# EAGLE board MCU_Module (EAGLE 9.0.0)
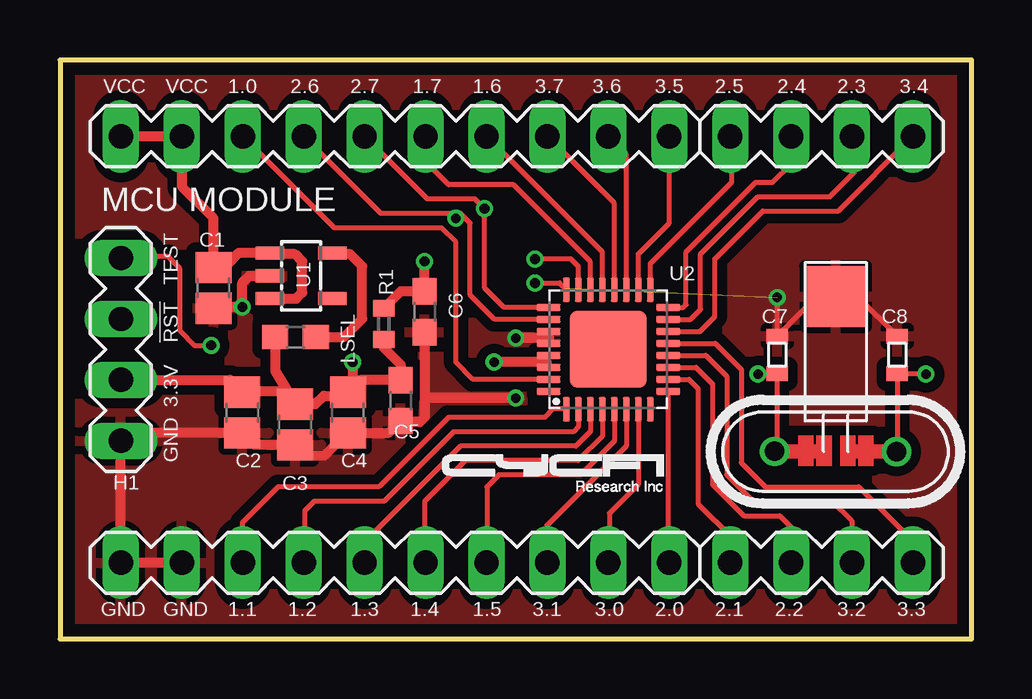
[diagram p0: board, top side]
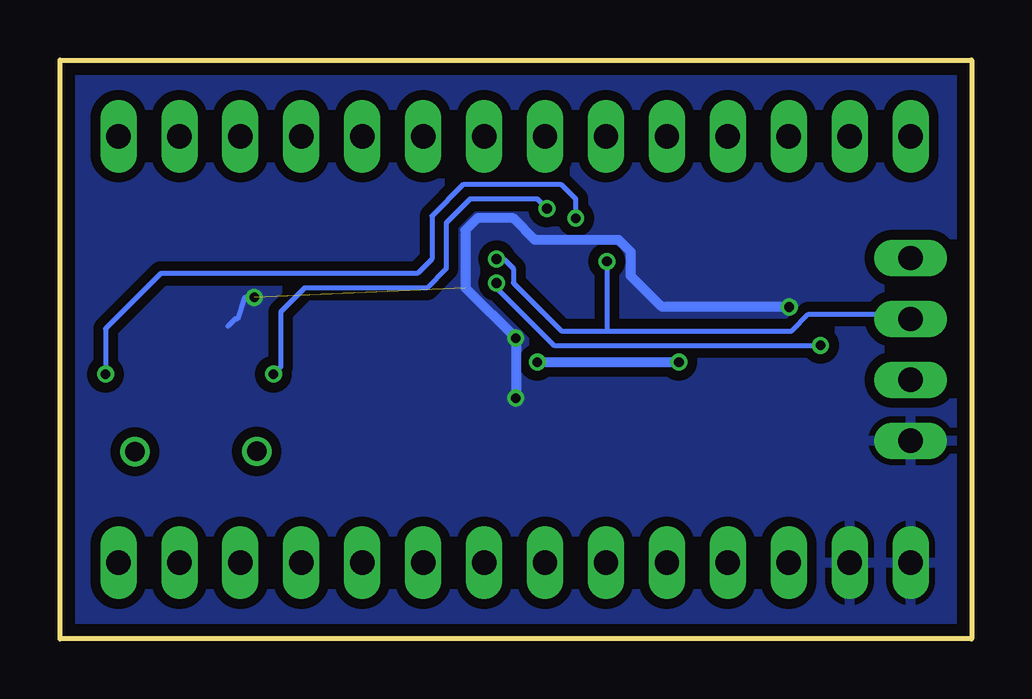
[diagram p1: board, bottom side, seen from below]

Size 38 x 24.14 mm. Coordinates in mm from the lower left corner, seen from the top.
Outline: 0,0 38,0 38,24.14 0,24.14 0,0
Copper layers (1*16): Top 0.035mm / dielectric 1.6mm / Bottom 0.035mm
Design rules "Elecrow_2-layer_PCB_eagle_rule": minimum track width 6mil, minimum drill 12mil, track to track 6mil, track to pad 8mil, pad to pad 12mil, via to via 12mil, smd to smd 0mil, copper to edge 20mil, drill to drill 10mil, minimum pad ring 6mil, minimum via ring 6mil, stop-mask expansion 0mil, vias tented up to drill 100mil, thermal gap 10mil
Net classes: 1 Ground: width 0.1 mm, drill 0.2 mm

## Footprints (pad centres in the part's own frame; a part is rotated, then mirrored left to right if it is on the bottom)
C0805 = smd 1.3 x 1.5: 1 -0.85,0; 2 0.85,0
C0603 = smd 1.1 x 1: 1 -0.85,0; 2 0.85,0
0603 = smd 0.6 x 0.9: 1 -0.787,0; 2 0.787,0
MA04-1 = drill 1.016 long: 1 -3.81,0; 2 -1.27,0; 3 1.27,0; 4 3.81,0
0603' = smd 1.1 x 1: 1 -0.85,0; 2 0.85,0
QUARZ5 = drill 0.813: 1 1.53,1.773; 2 1.52,-3.303 | smd 2.54 x 2.54: GND@0 -4.941,-0.762
R0402 = smd 0.7 x 0.9: 1 -0.65,0; 2 0.65,0
MA10-1 = drill 1.016 long: 1 -11.43,0; 2 -8.89,0; 3 -6.35,0; 4 -3.81,0; 5 -1.27,0; 6 1.27,0; 7 3.81,0; 8 6.35,0; 9 8.89,0; 10 11.43,0
SOT23-5 = smd 0.55 x 1.2: 1 -0.95,-1.3; 2 0,-1.3; 3 0.95,-1.3; 4 0.95,1.3; 5 -0.95,1.3
QFN32 = smd 1.016 x 0.3: 1 -2.49,1.75; 2 -2.49,1.25; 3 -2.49,0.75; 4 -2.49,0.25; 5 -2.49,-0.25; 6 -2.49,-0.75; 7 -2.49,-1.25; 8 -2.49,-1.75; 17 2.49,-1.75; 18 2.49,-1.25; 19 2.49,-0.75; 20 2.49,-0.25; 21 2.49,0.25; 22 2.49,0.75; 23 2.49,1.25; 24 2.49,1.75 | smd 0.3 x 1.016: 9 -1.75,-2.49; 10 -1.25,-2.49; 11 -0.75,-2.49; 12 -0.25,-2.49; 13 0.25,-2.49; 14 0.75,-2.49; 15 1.25,-2.49; 16 1.75,-2.49; 25 1.75,2.49; 26 1.25,2.49; 27 0.75,2.49; 28 0.25,2.49; 29 -0.25,2.49; 30 -0.75,2.49; 31 -1.25,2.49; 32 -1.75,2.49 | smd 3.2 x 3.2: EXP 0,0

## Placement (x,y rotation side)
C1  1uf  [C0805]  6.4,14.64 270 top
C2  33uf  [C0805]  7.6,9.44 270 top
C3  10uf  [C0805]  9.8,8.94 270 top
C4  2.2uf  [C0805]  12,9.44 270 top
C5  0.1uf  [C0603]  14.2,9.94 270 top
C6  1nf  [C0603]  15.2,13.64 270 top
C7  12pF  [0603]  29.9,11.84 270 top
C8  12pF  [0603]  34.9,11.84 270 top
H1  [MA04-1]  2.54,12.07 270 top
LSEL  [0603']  9.82,12.59 180 top
Q1  QUARZ5  [QUARZ5]  33.1,9.34 270 top
R1  47K  [R0402]  13.5,13.14 90 top
SV1  [MA04-1]  31.75,3.18 0 top
SV2  [MA04-1]  31.75,20.96 0 top
SV4  [MA10-1]  13.97,3.18 0 top
SV5  [MA10-1]  13.97,20.96 0 top
U1  MIC5205-3.3  [SOT23-5]  10.05,15.14 270 top
U2  MSP430G2553RHB32  [QFN32]  22.86,12.07 90 top

## Library data of the parts
C1-C6 R1 = resistor
C7 C8 = ssmd
H1 SV1 SV2 SV4 SV5 = con-lstb; OC_FARNELL: unknown; OC_NEWARK: unknown
LSEL = Cycfi
Q1 = sMSP430
U1 = v-reg-micrel; MF: ALTERA CORPORATION; MPN: MIC5219BM5 TR; OC_FARNELL: 1100656; OC_NEWARK: 09J8939
U2 = CYCFI_IC

## Nets
!RST: C6.1 H1.2 R1.2 U2.23
DVCC(3.3V): C2.1 C3.1 C4.1 C5.1 H1.3 LSEL.2 R1.1 U2.29 U2.30
GND: C1.2 C2.2 C3.2 C4.2 C5.2 C6.2 C7.1 C8.1 H1.4 Q1.GND@0 SV4.1 SV4.2 U1.2 U2.27 U2.28
N$1: LSEL.1 U1.5
NC_2: U2.32
P1.0: SV5.3 U2.31
P1.1: SV4.3 U2.1
P1.2: SV4.4 U2.2
P1.3: SV4.5 U2.3
P1.4: SV4.6 U2.4
P1.5: SV4.7 U2.5
P1.6: SV5.7 U2.21
P1.7: SV5.6 U2.22
P2.0: SV4.10 U2.9
P2.1: SV1.1 U2.10
P2.2: SV1.2 U2.11
P2.3: SV2.3 U2.15
P2.4: SV2.2 U2.16
P2.5: SV2.1 U2.17
P2.6: C8.2 Q1.1 SV5.4 U2.26
P2.7: C7.2 Q1.2 SV5.5 U2.25
P3.0: SV4.9 U2.7
P3.1: SV4.8 U2.6
P3.2: SV1.3 U2.12
P3.3: SV1.4 U2.13
P3.4: SV2.4 U2.14
P3.5: SV5.10 U2.18
P3.6: SV5.9 U2.19
P3.7: SV5.8 U2.20
TEST: H1.1 U2.24
VCC: C1.1 SV5.1 SV5.2 U1.1 U1.3

## Tracks (layer width: path | path; a pad name or v marks a point on that pad's centre or on a via)
!RST  (via drill 0.4)
  Top 0.203: U2.23 21.61,15.53 21.3,15.84 v19.8,15.84
  Top 0.406: R1.2 14.2,14.49 C6.1 v15.2,15.74
  Bottom 0.203: 15.2,12.84 17.1,12.84 19.1,14.84 19.1,15.44 19.5,15.84 v19.8,15.84 | 15.2,12.84 7.5,12.84 6.8,13.54 2.74,13.54 H1.2 | v15.2,15.74 15.2,12.84
DVCC(3.3V)  (via drill 0.4)
  Top 0.203: U2.29 U2.30 20.37,11.47 20.3,11.54
  Top 0.406: 12.43,10.71 12.5,10.79 C5.1 14.2,11.44 13.5,12.14 R1.1 | 12.43,10.71 C4.1 11.85,10.14 11,10.14 10.65,9.79 C3.1 | LSEL.2 8.97,11.17 C3.1 | H1.3 7.09,10.8 C2.1 7.65,10.34 9.25,10.34 C3.1 | 20.3,11.54 v18.1,11.54 | v12.2,11.54 12.2,10.94 12.43,10.71
  Bottom 0.406: v18.1,11.54 v12.2,11.54
GND  (via drill 0.4)  (1 unrouted)
  Top 0.203: U2.28 U2.27 20.37,12.57 20.4,12.54 | C8.1 33.25,14.28 Q1.GND@0 31.55,14.28 C7.1 v29.9,14.24
  Top 0.406: U1.2 7.9,15.14 7.6,14.84 v7.6,13.84 6.45,13.84 C1.2 | C6.2 15.2,10.04 | 15.2,10.04 15.2,9.24 15,9.04 14.25,9.04 C5.2 13.7,8.59 C4.2 11.95,8.59 11,7.64 10.25,7.64 C3.2 8.1,8.09 C2.2 2.87,8.59 H1.4 SV4.1 SV4.2 | 20.4,12.54 v19,12.54 | v19,10.04 15.2,10.04
  Bottom 0.203: v29.9,14.24 30.3,14.24 30.6,13.34 30.7,13.34 31,13.04
  Bottom 0.406: v19,10.04 v19,12.54 21.1,14.64 21.1,17.04 20.6,17.54 19.1,17.54 18.2,16.64 14.7,16.64 14.2,16.14 14.2,15.14 12.9,13.84 v7.6,13.84
  pour Bottom (isolate 0.406): 0,24.14 38,24.14 38,0 0,0
  pour Top (isolate 0.406): 0,24.14 38,24.14 38,0 0,0
N$1
  Top 0.406: LSEL.1 11.85,12.59 12.6,13.34 12.6,15.54 12.1,16.04 11.65,16.04 U1.5
P1.0
  Top 0.203: U2.31 17.22,10.82 16.5,11.54 16.5,16.54 15.9,17.14 11.44,17.14 SV5.3
P1.1
  Top 0.203: SV4.3 7.6,3.2 7.6,4.84 9.1,6.34 13.3,6.34 16.2,9.24 20.2,9.24 20.54,9.58 U2.1
P1.2
  Top 0.203: U2.2 21.61,8.85 21.4,8.64 16.4,8.64 13.5,5.74 10.6,5.74 10.2,5.34 10.2,3.22 SV4.4
P1.3
  Top 0.203: U2.3 22.11,8.65 21.5,8.04 16.7,8.04 12.7,4.04 SV4.5
P1.4
  Top 0.203: U2.4 22.61,8.45 21.6,7.44 16.9,7.44 15.2,5.74 15.2,3.22 SV4.6
P1.5
  Top 0.203: U2.5 23.11,8.25 21.7,6.84 18.3,6.84 17.8,6.34 17.8,3.2 SV4.7
P1.6
  Top 0.203: U2.21 22.61,16.13 SV5.7
P1.7
  Top 0.203: U2.22 22.11,15.73 18.9,18.94 16.2,18.94 15.2,19.94 15.2,20.92 SV5.6
P2.0
  Top 0.203: U2.9 25.35,3.23 SV4.10
P2.1
  Top 0.203: U2.10 26.22,10.82 26.6,10.44 26.6,5.64 28,4.24 28,3.24 SV1.1
P2.2
  Top 0.203: U2.11 26.52,11.32 27.2,10.64 27.2,6.44 28.5,5.14 30,5.14 30.5,4.64 30.5,3.2 SV1.2
P2.3
  Top 0.203: SV2.3 33.1,20.88 33.1,19.44 32.1,18.44 29.1,18.44 26.7,16.04 26.7,13.74 26.28,13.32 U2.15
P2.4
  Top 0.203: U2.16 25.98,13.82 26.1,13.94 26.1,16.14 29,19.04 29.7,19.04 30.5,19.84 30.5,20.94 SV2.2
P2.5
  Top 0.203: U2.17 24.61,15.65 28,19.04 28,20.9 SV2.1
P2.6  (via drill 0.4)
  Top 0.203: SV5.4 13.38,17.74 16.7,17.74 | U2.26 18.12,13.32 17.1,14.34 17.1,17.34 16.7,17.74 | 16.7,17.74 v16.5,17.54 | v36.1,11.04 34.91,11.04 C8.2 34.9,7.84 Q1.1
  Bottom 0.203: v16.5,17.54 16.5,18.34 17.1,18.94 21.2,18.94 22.5,17.64 22.5,15.84 23.1,15.24 33.8,15.24 36.1,12.94 v36.1,11.04
P2.7  (via drill 0.4)
  Top 0.203: SV5.5 15.32,18.34 17.3,18.34 v17.7,17.94 17.7,14.64 18.52,13.82 U2.25 | v29.1,11.04 29.89,11.04 | 29.89,11.04 C7.2 | 29.89,11.04 29.89,7.91 Q1.2
  Bottom 0.203: v17.7,17.94 18.1,18.34 20.9,18.34 21.9,17.34 21.9,15.44 22.7,14.64 27.8,14.64 28.8,13.64 28.8,11.34 v29.1,11.04
P3.0
  Top 0.203: U2.7 24.11,6.45 22.9,5.24 22.9,3.22 SV4.9
P3.1
  Top 0.203: U2.6 23.61,8.05 20.3,4.74 20.3,3.2 SV4.8
P3.2
  Top 0.203: U2.12 26.92,11.82 27.8,10.94 27.8,6.84 28.9,5.74 32.2,5.74 33,4.94 33,3.2 SV1.3
P3.3
  Top 0.203: U2.13 27.32,12.32 28.4,11.24 28.4,7.34 29.4,6.34 33.3,6.34 35.6,4.04 35.6,3.22 SV1.4
P3.4
  Top 0.203: U2.14 26.68,12.82 27.3,13.44 27.3,15.84 29.3,17.84 32.44,17.84 SV2.4
P3.5
  Top 0.203: U2.18 24.11,16.05 25.4,17.34 SV5.10
P3.6
  Top 0.203: U2.19 23.61,20.21 SV5.9
P3.7
  Top 0.203: U2.20 23.11,18.17 SV5.8
TEST  (via drill 0.4)
  Top 0.203: H1.1 2.6,15.94 4.5,15.94 5,15.44 5,12.84 5.6,12.24 v6.3,12.24 | v19.8,14.84 20.83,14.84 U2.24
  Bottom 0.203: v6.3,12.24 17.4,12.24 19.8,14.64 v19.8,14.84
VCC
  Top 0.406: U1.3 9.85,14.19 10.1,14.44 10.1,15.74 9.8,16.04 9.05,16.04 U1.1 7.45,16.09 7,15.64 6.55,15.64 C1.1 6.4,17.54 5.1,18.84 5.1,20.94 SV5.2 SV5.1

## Text on the board
tNames: VCC | VCC | 1.0 | 2.6 | 2.7 | 1.7 | 1.6 | 3.7 | 3.6 | 3.5 | 2.5 | 2.4 | 2.3 | 3.4 | MCU MODULE | TEST | !RST | 3.3V | GND | H1 | GND | GND | 1.1 | 1.2 | 1.3 | 1.4 | 1.5 | 3.1 | 3.0 | 2.0 | 2.1 | 2.2 | 3.2 | 3.3